# Altium PCB l6.pcbdoc
Units mil, origin at the board's own origin, x right, y up, seen from the top; angles counter-clockwise.
Board outline 4919.99 x 4159.99 mil, 2 copper layers (Top Layer, Bottom Layer); 6 components, 15 nets, 44 pads, 17 vias.
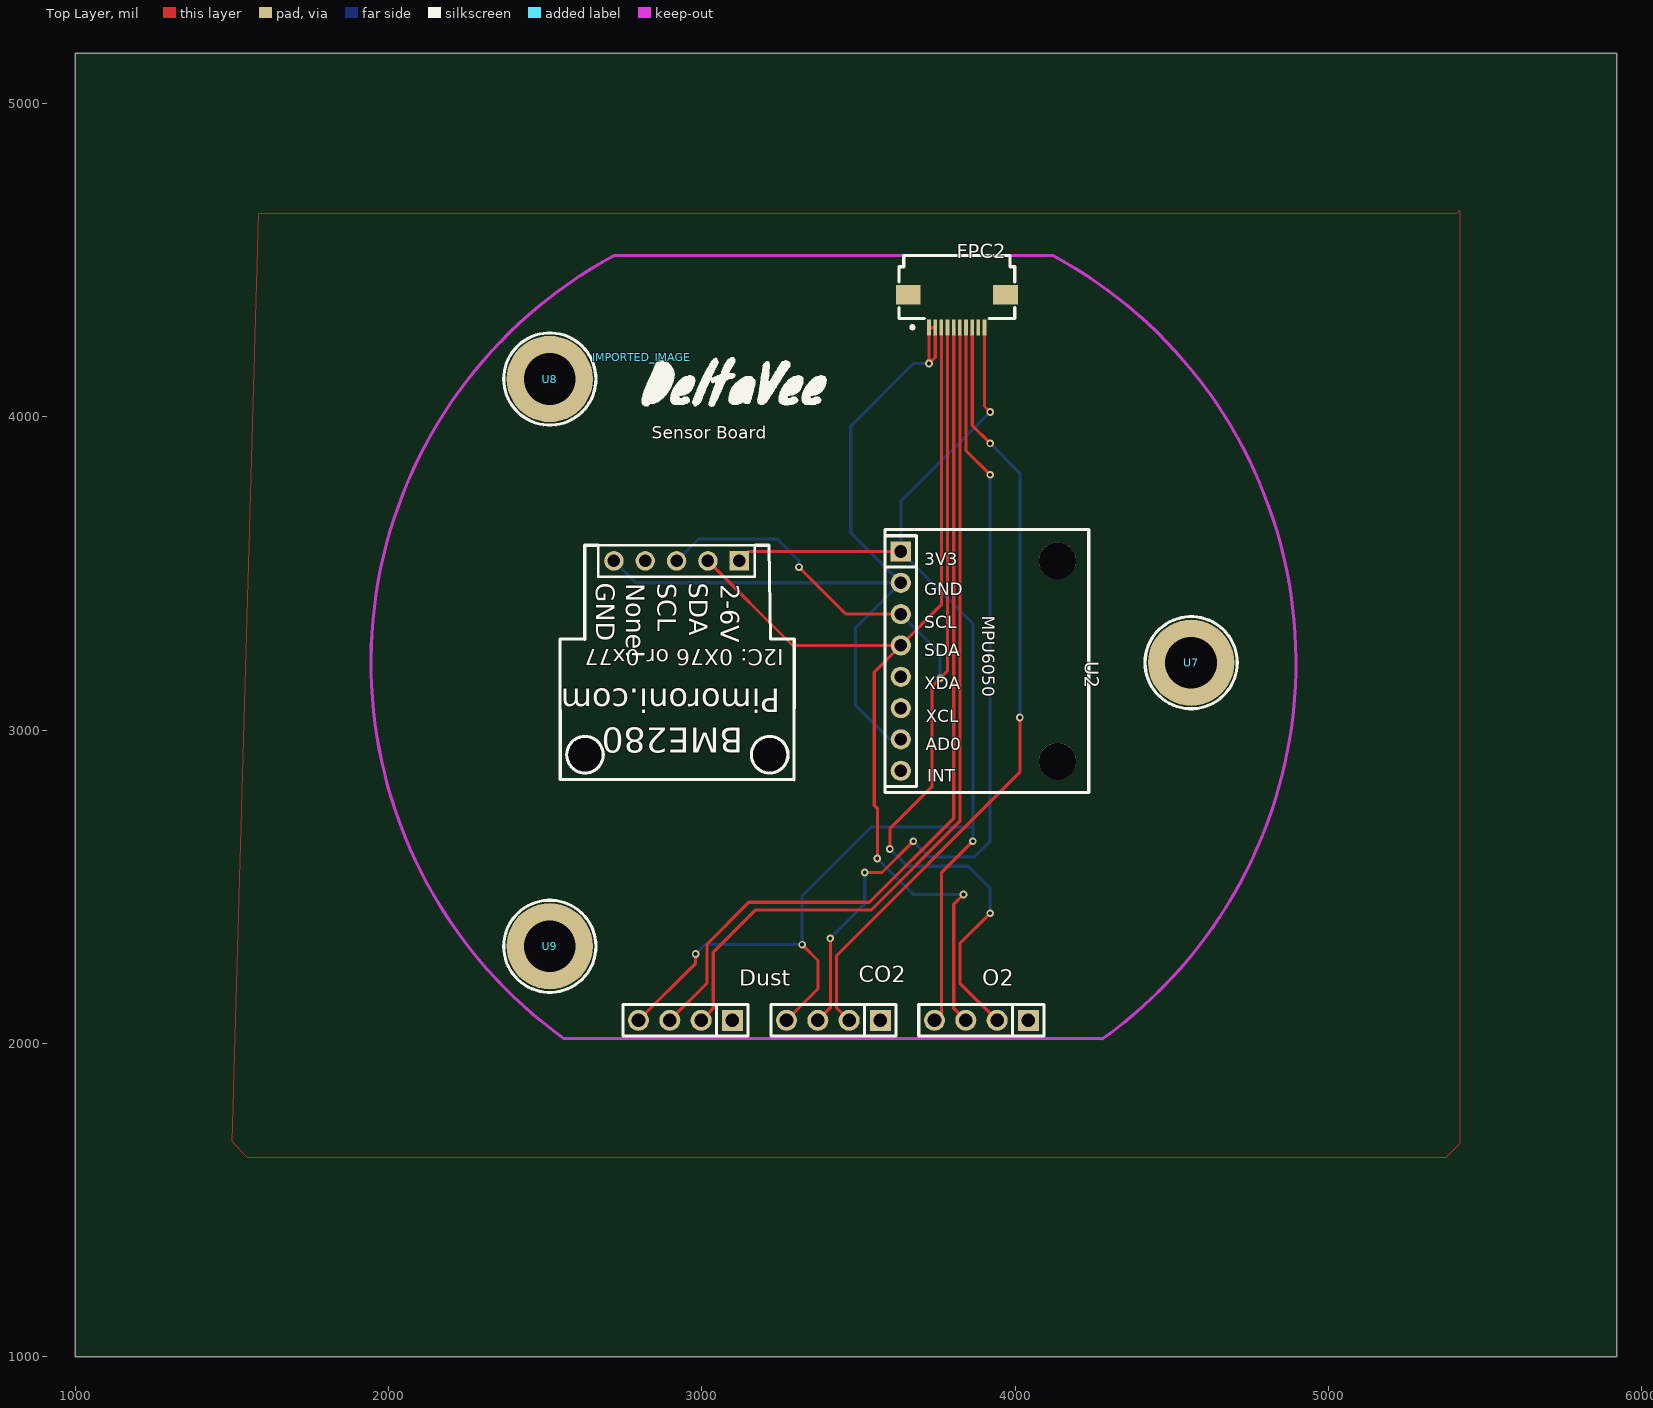
[diagram p0: Top Layer view]
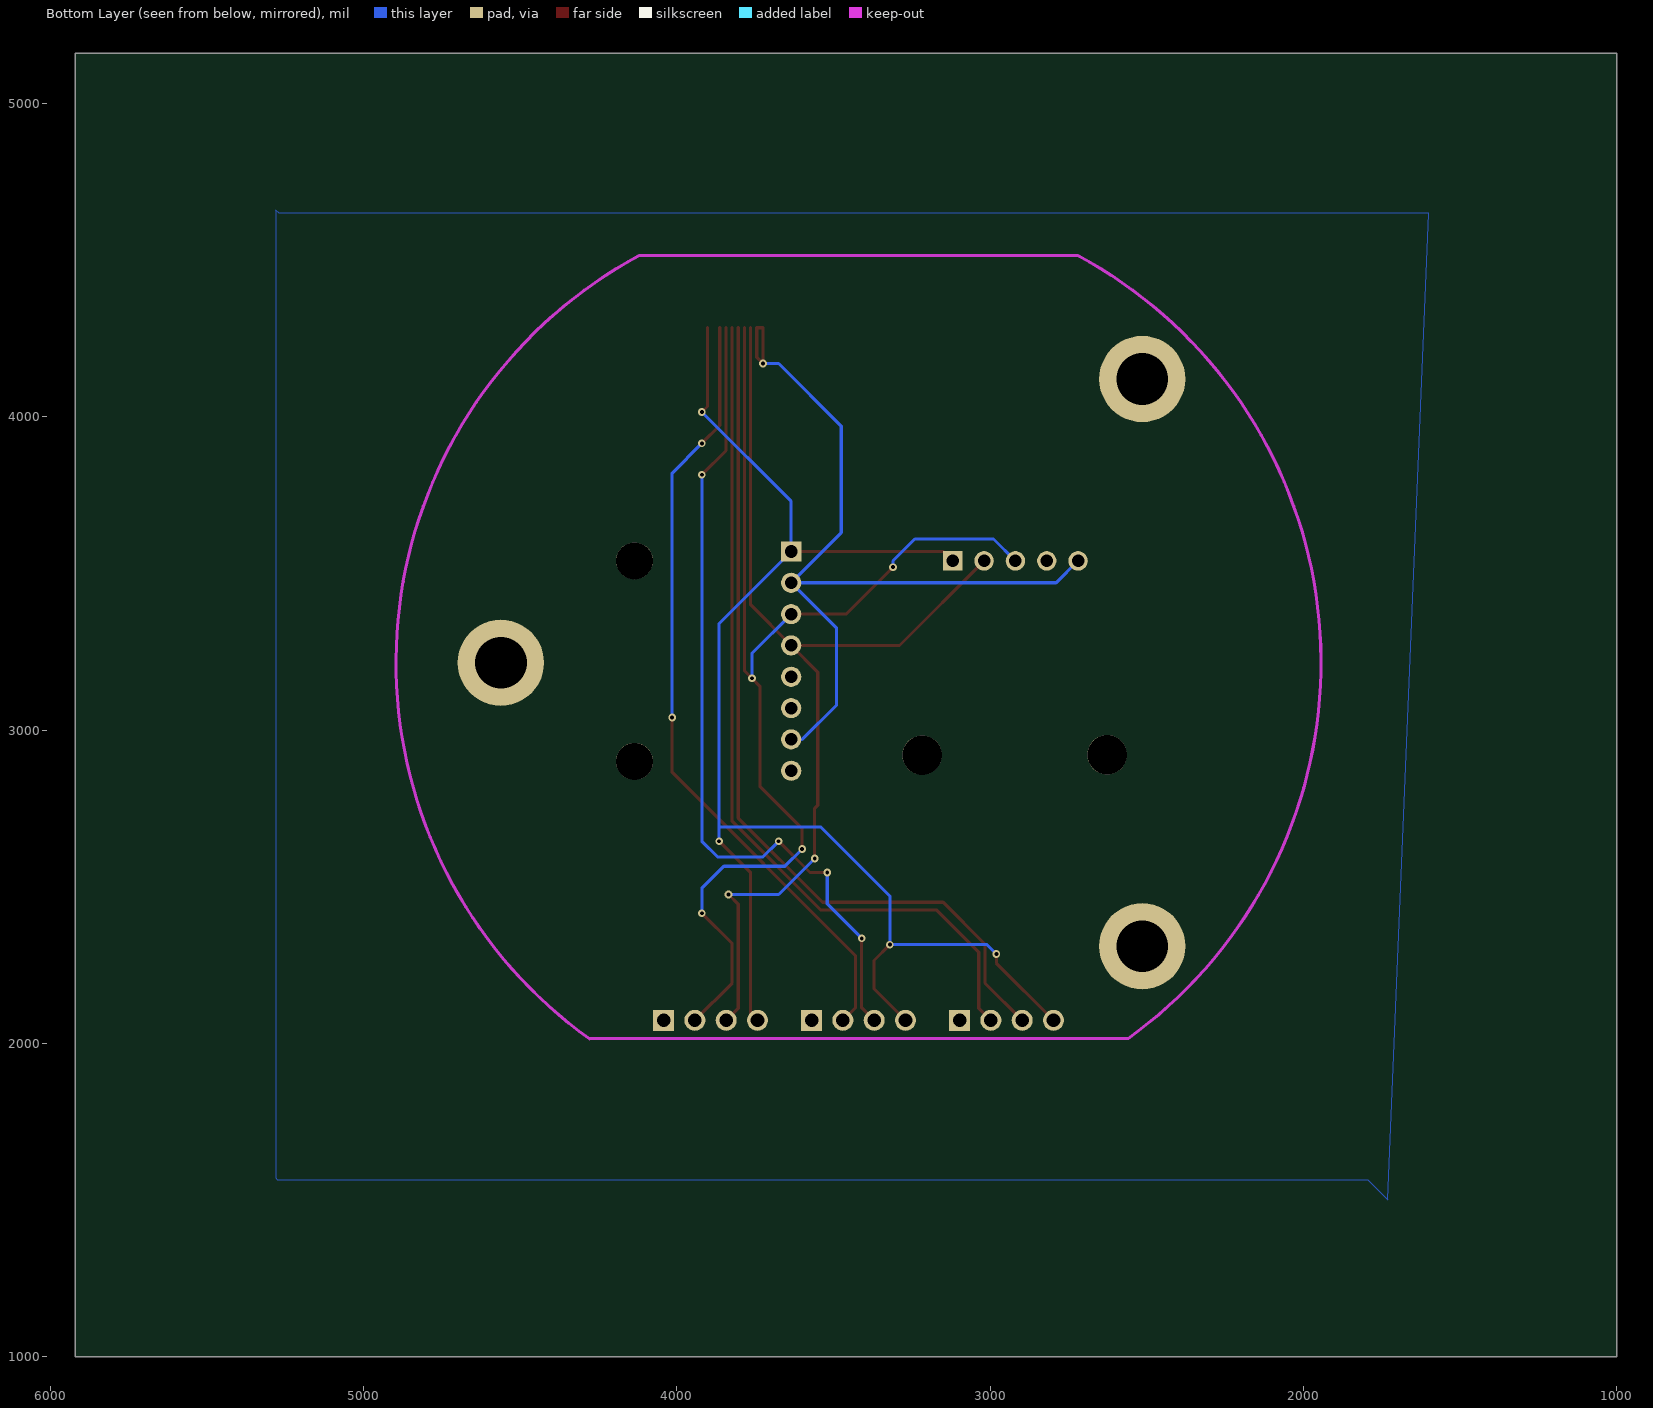
[diagram p1: Bottom Layer view, seen from below]

## Layer stack, top to bottom
Top Layer: signal copper (thickness not stored)
Dielectric: dielectric 12.6, FR-4, Dk 4.8
Bottom Layer: signal copper (thickness not stored)

## Board outline
5919.99,1000 1000,1000 1000,5159.99 5919.99,5159.99

## Components (designator, comment, footprint, x,y, rotation, side; value= is the part's Value field where it differs from the comment)
FPC2 "AFC01-S10FCA-00" FPC-SMD_P0.5-10P_FGS-XJ-H2.0 3813.7,4337.04 r0 top
IMPORTED_IMAGE "IMPORTED_IMAGE" IMPORTED_IMAGE 2807.27,4190.2 r0 top
U2 "MPU6050 MODULE" MPU6050 3934.99,3410 r270 top
U7 "MH_M4_S" MH_M4_PCB 4561.73,3215 r0 top
U8 "MH_M4_S" MH_M4_PCB 2514.49,4120.51 r0 top
U9 "MH_M4_S" MH_M4_PCB 2514.49,2309.49 r0 top

## Footprints (in the part's own frame and the unit in brackets; to place one, negate y for a bottom-side part, rotate by r counter-clockwise, add the part's x,y. Pads: shape width x height; smd on the part's side, far side on the other; paste and mask are expansions set on the pad)
FPC-SMD_P0.5-10P_FGS-XJ-H2.0 [mm]
  rect 0.3x1.3 smd paste+0 mask+0.051: 1(-2.25,-1.338) 2(-1.75,-1.338) 3(-1.25,-1.34) 4(-0.75,-1.338) 5(-0.25,-1.34) 6(0.25,-1.338) 7(0.75,-1.338) 8(1.25,-1.338) 9(1.75,-1.338) 10(2.25,-1.34)
  rect 2x1.6 smd paste+0 mask+0.051: 11(3.95,1.34) 12(-3.95,1.34)
  silkscreen extent -4.7,-1.4 4.7,4.5
IMPORTED_IMAGE [mil]
  silkscreen extent 0,-157 591,0
MH_M4_PCB [mm]
  round 7 hole 4.2 paste+0 mask+0.051: 1(0,0)
  silkscreen extent -3.74,-3.73 3.74,3.73
MPU6050 [mil]
  rect 64.3x64.3 hole 40.2 paste+0 mask+4: 1(-160,-300)
  round 64.3 hole 40.2 paste+0 mask+4: 2(-60,-300) 3(40,-300) 4(140,-300) 5(240,-300) 6(340,-300) 7(440,-300) 8(540,-300)
  round 118.11 hole 118.11 unplated paste+0: ""(-130,200) ""(510,200)
  silkscreen extent -230,-350 610,300

## Free pads (board coordinates)
  rect 66.93x66.93 hole 43.31 paste+0 mask+2: 1(3097.56,2073.27) 1(3570,2073.27) 1(4042.44,2073.27)
  rect 62x62 hole 40.16 paste+0 mask+2: 1(3119.18,3540)
  round 66.93 hole 43.31 paste+0 mask+2: 2(2997.56,2073.27) 2(3470,2073.27) 2(3942.44,2073.27) 3(2897.56,2073.27) 3(3370,2073.27) 3(3842.44,2073.27) 4(2797.56,2073.27) 4(3270,2073.27) 4(3742.44,2073.27)
  round 62 hole 40.16 paste+0 mask+2: 2(3019.18,3540) 3(2919.18,3540) 4(2819.18,3540) 5(2719.18,3540)
  round 125.98 hole 125.98 unplated paste+0: ""(2626.67,2921.11) ""(3217.25,2920)

## Via types
v1: diameter 24.41, hole 12.2, Top Layer to Bottom Layer, tented both sides, 17 vias

## Nets (pads, with @x,y where several pads share a name; then routed paths per layer and width w, separated by ;. In a path a pad name is that pad's centre, name@x,y a point inside that pad or via, vN(x,y) a via of type N, cw(c..) or ccw(c..) an arc to the next point about the centre after c; other vN are vias at no path point)
3.3V: FPC2.9
+5V: FPC2.10 pad.1@3119.18,3540 pad.4@2797.56,2073.27 pad.4@3270,2073.27 pad.4@3742.44,2073.27 U2.1 | length 4791.1
  Top Layer w10: pad.4@2797.56,2073.27 2980,2255.71 v1(2980,2285) ; pad.1@3119.19,3540 3149.19,3570 U2.1 ; pad.4@3270,2073.27 3370.79,2174.06 3370.79,2264.21 v1(3320,2315) ; pad.4@3742.44,2073.27 3764.49,2095.32 3764.49,2544.49 v1(3865,2645) ; FPC2.10 3902.28,4032.71 v1(3920,4015)
  Bottom Layer w10: v1(2980,2285) 3010,2315 v1(3320,2315) 3320,2470 3540,2690 3865,2690 v1(3865,2645) 3865,3340 U2.1 3635,3730 v1(3920,4015)
A4: FPC2.3 pad.2@3019.18,3540 pad.3@3842.44,2073.27 U2.4 | length 3268.2
  Top Layer w10: pad.2@3019.19,3540 3289.19,3270 U2.4 ; v1(3560,2590) 3560,2750 3550,2760 3550,3185 U2.4 ; FPC2.3 3764.49,3399.49 U2.4 ; v1(3835,2475) 3803.86,2443.86 3803.86,2111.85 pad.3@3842.44,2073.27
  Bottom Layer w10: v1(3560,2590) 3675,2475 v1(3835,2475)
A5: FPC2.4 pad.2@3942.44,2073.27 pad.3@2919.18,3540 U2.3 | length 3736.1
  Top Layer w10: v1(3310,3520) 3459.99,3370 U2.3 ; v1(3600,2620) 3600,2685 3735,2820 3735,3140 v1(3760,3165) 3784.17,3189.17 FPC2.4 ; v1(3920,2415) 3823.54,2318.54 3823.54,2192.17 pad.2@3942.44,2073.27
  Bottom Layer w10: pad.3@2919.19,3540 2989.18,3610 3240,3610 3310,3540 v1(3310,3520) ; v1(3600,2620) 3655,2565 3850,2565 3920,2495 v1(3920,2415) ; U2.3 3759.99,3245 v1(3760,3165)
D2: FPC2.8 pad.2@3470,2073.27 | length 2533.1
  Top Layer w10: pad.2@3470,2073.3 3429.8,2113.4 3429.8,2279.8 4015,2865 v1(4015,3040) ; FPC2.8 3862.91,3972.09 v1(3920,3915)
  Bottom Layer w10: v1(3920,3915) 4015,3820 v1(4015,3040)
D3: FPC2.7 pad.3@3370,2073.27 | length 2687.9
  Top Layer w10: pad.3@3370,2073.3 3410.2,2113.5 v1@3410.2,2335 ; v1(3520,2545) 3574.99,2545 v1(3675,2645) ; FPC2.7 3843.23,3891.76 v1(3920,3815)
  Bottom Layer w10: v1(3410,2335) 3520,2445 v1(3520,2545) ; v1(3675,2645) 3725,2595 3870,2595 3920,2645 v1(3920,3815)
D7: FPC2.6 pad.2@2997.56,2073.27 | length 2770
  Top Layer w10: pad.2@2997.56,2073.27 3036.1,2111.81 3036.1,2291.1 3170,2425 3540,2425 3823.5,2708.5 FPC2.6@3823.5,4284.4
D8: FPC2.5 pad.3@2897.56,2073.27 | length 2811.9
  Top Layer w10: pad.3@2897.56,2073.27 3016.46,2192.17 3016.46,2316.46 3150,2450 3535,2450 3803.86,2718.86 FPC2.5
GND: FPC2.1 FPC2.2 pad.1@3097.56,2073.27 pad.1@3570,2073.27 pad.1@4042.44,2073.27 pad.5 U2.2 U2.7 U7.1 U8.1 U9.1 | length 2741.2
  Top Layer w10: v1(3725.12,4170) 3744.8,4189.68 FPC2.2 FPC2.1 v1(3725.12,4170)
  Bottom Layer w10: pad.5 2789.19,3470 U2.2 ; U2.7 3600,2970 3490,3080 3490,3325 U2.2 ; v1(3725.12,4170) 3675,4169.99 3475,3969.99 3475,3630 U2.2
S$1570: 
S$1574: 
S$2248: 
U2_5: U2.5
U2_6: U2.6
U2_8: U2.8
pads on no net: FPC2.11 FPC2.12 U2.

## Polygon pours and split planes (outlines as drawn)
GND on Bottom Layer (solid): 1600,4649.99 5269.99,4649.99 5279.99,4659.99 5279.99,1570 5274.99,1565 1795,1565 1730,1500
GND on Top Layer (solid): 1585,4649.99 5409.99,4649.99 5419.99,4659.99 5419.99,1680 5374.99,1635 1550,1635 1500,1685

## Keep-outs
Keep-Out Layer:
  lines w10 net S$2248: 2559.98,2014.97 cw(c3420,3215) 2720.05,4514.9 ; 4119.94,4514.9 cw(c3419.99,3215) 4278.59,2013.96

## Silkscreen, mask and mechanical layers (free items; w line width, h text height)
Top Overlay:
  circle w10: c3216.41,2921.1 r58.33
  circle w10: c2626.67,2921.11 r58.33
  lines w7.99: 2669.18,3490 3094.18,3490
  lines w8: 2669.18,3490 2669.18,3590 3169.18,3590 3169.18,3490 3094.18,3490
  lines w10: 2669.18,3590 2625.85,3590 2626.18,3289.89 2546.96,3291 2547.78,2842 3294.44,2841.11 3294.74,3291 3219.18,3290 3214.74,3590 3169.18,3590 ; 3046.63,2123.27 3046.63,2023.27 ; 3519.07,2123.27 3519.07,2023.27 ; 3991.51,2123.27 3991.51,2023.27 ; 3046.63,2023.27 2747.56,2023.27 2747.56,2123.27 3147.56,2123.27 3147.56,2023.27 3046.63,2023.27 ; 3519.07,2023.27 3220,2023.27 3220,2123.27 3620,2123.27 3620,2023.27 3519.07,2023.27 ; 3991.51,2023.27 3692.44,2023.27 3692.44,2123.27 4092.44,2123.27 4092.44,2023.27 3991.51,2023.27
  text "Sensor Board" at 2840,3930.31 h39.37
  text "GND" at 2662.99,3470 h59.05 r270
  text "SDA" at 2959.66,3470 h59.05 r270
  text "None!" at 2757.99,3468.33 h59.05 r270
  text "SCL" at 2859.66,3468.33 h59.05 r270
  text "2-6V" at 3059.66,3465 h59.05 r270
  text "I2C: 0X76 or 0x77" at 3261.75,3257.21 h51.18 r180
  text "Pimoroni.com" at 3249.74,3132 h74.8 r180
  text "BME280" at 3131.96,3006.67 h80 r180
  text "CO2" at 3500,2194.41 h51.18
  text "Dust" at 3120,2184.41 h51.18
  text "O2" at 3895,2184.41 h51.18

## Text inside footprints (layer, text, board x,y; h text height)
U2: Top Overlay "3V3" at 3710,3525.31 h39.37; Top Overlay "GND" at 3710,3430.31 h39.37; Top Overlay "SCL" at 3710,3325.31 h39.37; Top Overlay "SDA" at 3710,3235.31 h39.37; Top Overlay "XDA" at 3710,3130.31 h39.37; Top Overlay "XCL" at 3715,3025.31 h39.37; Top Overlay "AD0" at 3715,2935.31 h39.37; Top Overlay "INT" at 3720,2835.31 h39.37; Top Overlay "MPU6050" at 3895.31,3365 h39.37 r270